# Altium PCB Ender-3.PcbDoc (part 7 of 14)
Units mil, origin at the board's own origin, x right, y up, seen from the top; angles counter-clockwise.
Board outline 3970.48 x 2769.68 mil, 2 copper layers (TopLayer, BottomLayer); 146 components, 136 nets, 669 pads, 614 vias.
Unrouted connection lines stored in the file: 1.
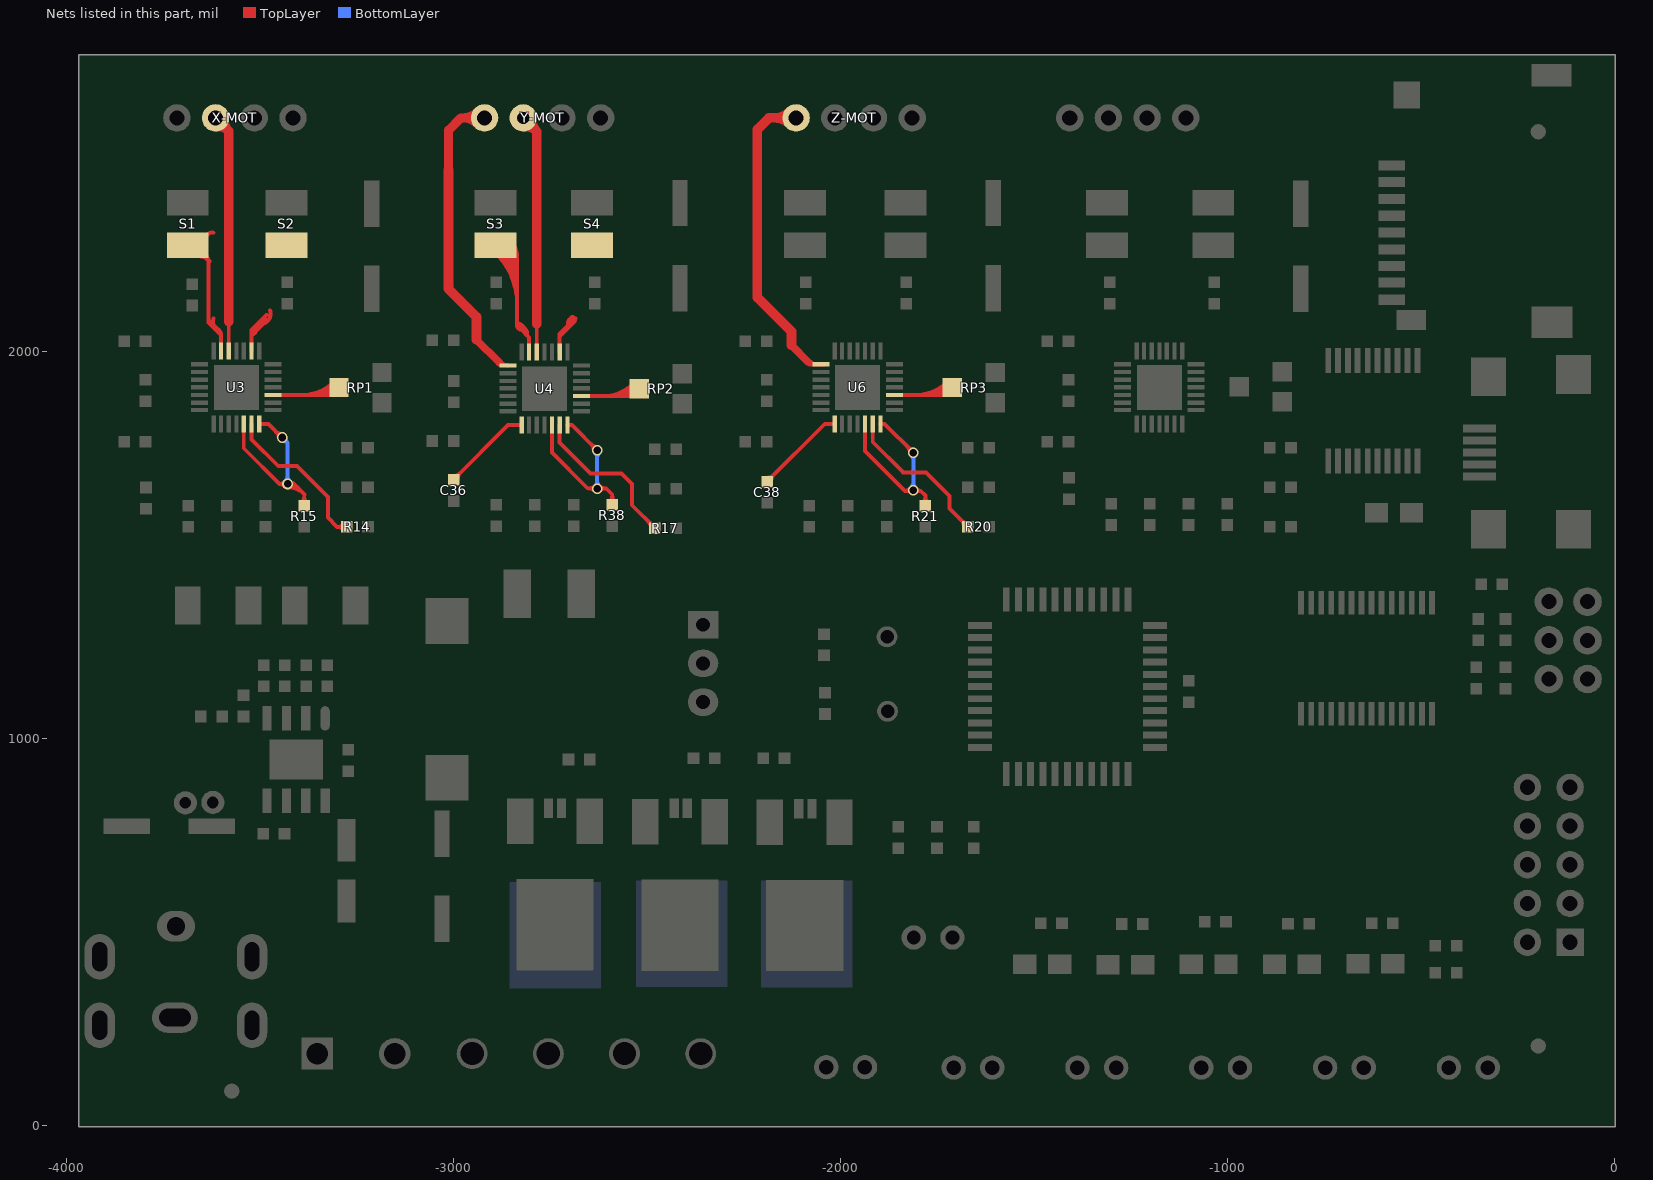
[diagram p7: the nets of this part, all layers, seen from the top]

## Via types
v1: diameter 28, hole 18, TopLayer to BottomLayer, tented both sides, 246 vias
v2: diameter 27.56, hole 19.68, TopLayer to BottomLayer, tented both sides, 196 vias
v3: diameter 20, hole 12, TopLayer to BottomLayer, tented both sides, 124 vias
v4: diameter 27.56, hole 11.81, TopLayer to BottomLayer, tented bottom, 16 vias
v5: diameter 27.56, hole 19.68, TopLayer to BottomLayer, 16 vias
v6: diameter 20, hole 12, TopLayer to BottomLayer, 12 vias
v7: diameter 28, hole 11.81, TopLayer to BottomLayer, tented both sides, 4 vias

## Nets (pads, with @x,y where several pads share a name; then routed paths per layer and width w, separated by ;. In a path a pad name is that pad's centre, name@x,y a point inside that pad or via, vN(x,y) a via of type N, cw(c..) or ccw(c..) an arc to the next point about the centre after c; other vN are vias at no path point) (continued)
NetU3_12: R15.1 U3.12 U3.14 | length 2802.5
  TopLayer w10: -3541.62,1750.93 U3.12@-3541.62,1813.88 ; -3540.62,1749.93 -3449.59,1658.9 ; U3.14@-3501.62,1813.88 -3501.12,1813.38 -3478.07,1813.38 v2@-3442.54,1777.84 ; v2@-3429.27,1659.87 cw(c-3421.02,1648.85) -3411.28,1658.59 ; v2@-3428.54,1650.12 cw(c-3428.54,1588.01) -3384.62,1631.93 ; v2@-3428.54,1660.12 cw(c-3428.54,1622.15) -3401.69,1649 ; v2@-3423.28,1651.87 cw(c-3414.03,1639.51) -3403.12,1650.42 ; R15.1@-3385.62,1602.88 -3385.62,1632.93 -3411.59,1658.9 ; -3459.23,1794.54 ccw(c-3442.54,1811.23) v2@-3442.54,1787.62 ; -3459.23,1794.54 ccw(c-3442.54,1811.23) v2@-3442.54,1787.62 ; -3459.23,1794.54 ccw(c-3442.54,1811.23) v2@-3442.54,1787.62 ; -3459.23,1794.54 ccw(c-3442.54,1811.23) v2@-3442.54,1787.62 ; -3459.23,1794.54 ccw(c-3442.54,1811.23) v2@-3442.54,1787.62 ; -3459.23,1794.54 ccw(c-3442.54,1811.23) v2@-3442.54,1787.62 ; -3459.23,1794.54 ccw(c-3442.54,1811.23) v2@-3442.54,1787.62 ; -3459.23,1794.54 ccw(c-3442.54,1811.23) v2@-3442.54,1787.62 ; -3459.23,1794.54 ccw(c-3442.54,1811.23) v2@-3442.54,1787.62 ; -3456.82,1792.12 cw(c-3470.1,1778.84) v2@-3451.31,1778.84 ; -3456.82,1792.12 cw(c-3470.1,1778.84) v2@-3451.31,1778.84 ; -3456.82,1792.12 cw(c-3470.1,1778.84) v2@-3451.31,1778.84 ; -3456.82,1792.12 cw(c-3470.1,1778.84) v2@-3451.31,1778.84 ; -3456.82,1792.12 cw(c-3470.1,1778.84) v2@-3451.31,1778.84 ; -3456.82,1792.12 cw(c-3470.1,1778.84) v2@-3451.31,1778.84 ; -3456.82,1792.12 cw(c-3470.1,1778.84) v2@-3451.31,1778.84 ; -3456.82,1792.12 cw(c-3470.1,1778.84) v2@-3451.31,1778.84 ; -3456.82,1792.12 cw(c-3470.1,1778.84) v2@-3451.31,1778.84 ; -3449.59,1658.9 cw(c-3449.59,1638.04) v2@-3434.77,1652.72 ; -3449.59,1658.9 ccw(c-3449.59,1679.75) v2@-3434.77,1665.07 ; -3449.59,1658.9 cw(c-3449.59,1638.04) v2@-3434.77,1652.72 ; -3449.59,1658.9 ccw(c-3449.59,1679.75) v2@-3434.77,1665.07 ; -3449.59,1658.9 cw(c-3449.59,1638.04) v2@-3434.77,1652.72 ; -3449.59,1658.9 ccw(c-3449.59,1679.75) v2@-3434.77,1665.07 ; -3449.59,1658.9 cw(c-3449.59,1638.04) v2@-3434.77,1652.72 ; -3449.59,1658.9 ccw(c-3449.59,1679.75) v2@-3434.77,1665.07 ; -3449.59,1658.9 cw(c-3449.59,1638.04) v2@-3434.77,1652.72 ; -3449.59,1658.9 ccw(c-3449.59,1679.75) v2@-3434.77,1665.07 ; -3449.59,1658.9 ccw(c-3449.59,1679.75) v2@-3434.77,1665.07 ; -3449.59,1658.9 cw(c-3449.59,1638.04) v2@-3434.77,1652.72 ; -3449.59,1658.9 ccw(c-3449.59,1679.75) v2@-3434.77,1665.07 ; -3449.59,1658.9 cw(c-3449.59,1638.04) v2@-3434.77,1652.72 ; -3449.59,1658.9 ccw(c-3449.59,1679.75) v2@-3434.77,1665.07 ; -3449.59,1658.9 cw(c-3449.59,1638.04) v2@-3434.77,1652.72 ; -3449.59,1658.9 ccw(c-3449.59,1679.75) v2@-3434.77,1665.07 ; -3449.59,1658.9 cw(c-3449.59,1638.04) v2@-3434.77,1652.72 ; -3449.59,1658.9 -3411.59,1658.9 ; v2@-3428.83,1660.08 cw(c-3423.17,1637.34) -3406.6,1653.91 ; v2@-3428.83,1660.08 cw(c-3423.17,1637.34) -3406.6,1653.91 ; v2@-3428.83,1660.08 cw(c-3423.17,1637.34) -3406.6,1653.91 ; v2@-3428.83,1660.08 cw(c-3423.17,1637.34) -3406.6,1653.91 ; v2@-3428.83,1660.08 cw(c-3423.17,1637.34) -3406.6,1653.91 ; v2@-3428.83,1660.08 cw(c-3423.17,1637.34) -3406.6,1653.91 ; v2@-3428.83,1660.08 cw(c-3423.17,1637.34) -3406.6,1653.91 ; v2@-3428.83,1660.08 cw(c-3423.17,1637.34) -3406.6,1653.91 ; v2@-3426.42,1650.38 cw(c-3418.19,1617.31) -3394.1,1641.4 ; v2@-3426.42,1650.38 cw(c-3418.19,1617.31) -3394.1,1641.4 ; v2@-3426.42,1650.38 cw(c-3418.19,1617.31) -3394.1,1641.4 ; v2@-3426.42,1650.38 cw(c-3418.19,1617.31) -3394.1,1641.4 ; v2@-3426.42,1650.38 cw(c-3418.19,1617.31) -3394.1,1641.4 ; v2@-3426.42,1650.38 cw(c-3418.19,1617.31) -3394.1,1641.4 ; v2@-3426.42,1650.38 cw(c-3418.19,1617.31) -3394.1,1641.4 ; v2@-3426.42,1650.38 cw(c-3418.19,1617.31) -3394.1,1641.4 ; v2@-3421.36,1653.83 cw(c-3411.59,1646.93) -3411.59,1658.9 ; v2@-3421.36,1653.83 cw(c-3411.59,1646.93) -3411.59,1658.9 ; v2@-3421.36,1653.83 cw(c-3411.59,1646.93) -3411.59,1658.9 ; v2@-3421.36,1653.83 cw(c-3411.59,1646.93) -3411.59,1658.9 ; v2@-3421.36,1653.83 cw(c-3411.59,1646.93) -3411.59,1658.9 ; v2@-3421.36,1653.83 cw(c-3411.59,1646.93) -3411.59,1658.9 ; v2@-3421.36,1653.83 cw(c-3411.59,1646.93) -3411.59,1658.9 ; v2@-3421.36,1653.83 cw(c-3411.59,1646.93) -3411.59,1658.9 ; v2@-3421.36,1653.83 cw(c-3411.59,1646.93) -3411.59,1658.9 ; v2@-3421.36,1663.96 ccw(c-3411.59,1670.86) -3411.59,1658.9 ; v2@-3421.36,1663.96 ccw(c-3411.59,1670.86) -3411.59,1658.9 ; v2@-3421.36,1663.96 ccw(c-3411.59,1670.86) -3411.59,1658.9 ; v2@-3421.36,1663.96 ccw(c-3411.59,1670.86) -3411.59,1658.9 ; v2@-3421.36,1663.96 ccw(c-3411.59,1670.86) -3411.59,1658.9 ; v2@-3421.36,1663.96 ccw(c-3411.59,1670.86) -3411.59,1658.9 ; v2@-3421.36,1663.96 ccw(c-3411.59,1670.86) -3411.59,1658.9 ; v2@-3421.36,1663.96 ccw(c-3411.59,1670.86) -3411.59,1658.9 ; v2@-3421.36,1663.96 ccw(c-3411.59,1670.86) -3411.59,1658.9 ; R15.1@-3392.69,1609.95 ccw(c-3409.76,1627.02) -3385.62,1627.02 ; R15.1@-3392.69,1609.95 ccw(c-3409.76,1627.02) -3385.62,1627.02 ; R15.1@-3392.69,1609.95 ccw(c-3409.76,1627.02) -3385.62,1627.02 ; R15.1@-3392.69,1609.95 ccw(c-3409.76,1627.02) -3385.62,1627.02 ; R15.1@-3392.69,1609.95 ccw(c-3409.76,1627.02) -3385.62,1627.02 ; R15.1@-3392.69,1609.95 ccw(c-3409.76,1627.02) -3385.62,1627.02 ; R15.1@-3392.69,1609.95 ccw(c-3409.76,1627.02) -3385.62,1627.02 ; R15.1@-3392.69,1609.95 ccw(c-3409.76,1627.02) -3385.62,1627.02 ; R15.1@-3392.69,1609.95 ccw(c-3409.76,1627.02) -3385.62,1627.02 ; -3385.62,1627.02 ccw(c-3361.48,1627.02) R15.1@-3378.55,1609.95 ; -3385.62,1627.02 ccw(c-3361.48,1627.02) R15.1@-3378.55,1609.95 ; -3385.62,1627.02 ccw(c-3361.48,1627.02) R15.1@-3378.55,1609.95 ; -3385.62,1627.02 ccw(c-3361.48,1627.02) R15.1@-3378.55,1609.95 ; -3385.62,1627.02 ccw(c-3361.48,1627.02) R15.1@-3378.55,1609.95 ; -3385.62,1627.02 ccw(c-3361.48,1627.02) R15.1@-3378.55,1609.95 ; -3385.62,1627.02 ccw(c-3361.48,1627.02) R15.1@-3378.55,1609.95 ; -3385.62,1627.02 ccw(c-3361.48,1627.02) R15.1@-3378.55,1609.95 ; -3385.62,1627.02 ccw(c-3361.48,1627.02) R15.1@-3378.55,1609.95
  BottomLayer w10: v2(-3442.54,1778.84) -3428.54,1764.84 ; v2(-3428.54,1658.9) -3428.54,1764.84 ; v2@-3442.1,1770.07 cw(c-3441.22,1752.16) -3428.54,1764.84 ; v2@-3442.1,1770.07 cw(c-3441.22,1752.16) -3428.54,1764.84 ; v2@-3442.1,1770.07 cw(c-3441.22,1752.16) -3428.54,1764.84 ; v2@-3442.1,1770.07 cw(c-3441.22,1752.16) -3428.54,1764.84 ; v2@-3442.1,1770.07 cw(c-3441.22,1752.16) -3428.54,1764.84 ; v2@-3442.1,1770.07 cw(c-3441.22,1752.16) -3428.54,1764.84 ; v2@-3442.1,1770.07 cw(c-3441.22,1752.16) -3428.54,1764.84 ; v2@-3442.1,1770.07 cw(c-3441.22,1752.16) -3428.54,1764.84 ; v2@-3442.1,1770.07 cw(c-3441.22,1752.16) -3428.54,1764.84 ; v2@-3434.74,1665.1 ccw(c-3449.73,1680.09) -3428.54,1680.09 ; v2@-3434.74,1665.1 ccw(c-3449.73,1680.09) -3428.54,1680.09 ; v2@-3434.74,1665.1 ccw(c-3449.73,1680.09) -3428.54,1680.09 ; v2@-3434.74,1665.1 ccw(c-3449.73,1680.09) -3428.54,1680.09 ; v2@-3434.74,1665.1 ccw(c-3449.73,1680.09) -3428.54,1680.09 ; v2@-3434.74,1665.1 ccw(c-3449.73,1680.09) -3428.54,1680.09 ; v2@-3434.74,1665.1 ccw(c-3449.73,1680.09) -3428.54,1680.09 ; v2@-3434.74,1665.1 ccw(c-3449.73,1680.09) -3428.54,1680.09 ; v2@-3434.74,1665.1 ccw(c-3449.73,1680.09) -3428.54,1680.09 ; v2@-3433.77,1778.41 ccw(c-3415.86,1777.52) -3428.54,1764.84 ; v2@-3433.77,1778.41 ccw(c-3415.86,1777.52) -3428.54,1764.84 ; v2@-3433.77,1778.41 ccw(c-3415.86,1777.52) -3428.54,1764.84 ; v2@-3433.77,1778.41 ccw(c-3415.86,1777.52) -3428.54,1764.84 ; v2@-3433.77,1778.41 ccw(c-3415.86,1777.52) -3428.54,1764.84 ; v2@-3433.77,1778.41 ccw(c-3415.86,1777.52) -3428.54,1764.84 ; v2@-3433.77,1778.41 ccw(c-3415.86,1777.52) -3428.54,1764.84 ; v2@-3433.77,1778.41 ccw(c-3415.86,1777.52) -3428.54,1764.84 ; v2@-3433.77,1778.41 ccw(c-3415.86,1777.52) -3428.54,1764.84 ; -3428.54,1680.09 ccw(c-3407.34,1680.09) v2@-3422.33,1665.1 ; -3428.54,1680.09 ccw(c-3407.34,1680.09) v2@-3422.33,1665.1 ; -3428.54,1680.09 ccw(c-3407.34,1680.09) v2@-3422.33,1665.1 ; -3428.54,1680.09 ccw(c-3407.34,1680.09) v2@-3422.33,1665.1 ; -3428.54,1680.09 ccw(c-3407.34,1680.09) v2@-3422.33,1665.1 ; -3428.54,1680.09 ccw(c-3407.34,1680.09) v2@-3422.33,1665.1 ; -3428.54,1680.09 ccw(c-3407.34,1680.09) v2@-3422.33,1665.1 ; -3428.54,1680.09 ccw(c-3407.34,1680.09) v2@-3422.33,1665.1 ; -3428.54,1680.09 ccw(c-3407.34,1680.09) v2@-3422.33,1665.1
NetU3_13: R14.1 U3.13 | length 751.9
  TopLayer w10: U3.13@-3521.62,1813.88 -3521.62,1773.93 -3452.54,1704.84 -3404.54,1704.84 -3324.54,1624.84 -3324.54,1571.84 -3300.57,1547.88 R14.1@-3275.62,1547.88 ; -3299.76,1547.88 cw(c-3299.76,1523.74) R14.1@-3282.69,1540.81 ; -3299.76,1547.88 ccw(c-3299.76,1572.02) R14.1@-3282.69,1554.95 ; -3299.76,1547.88 cw(c-3299.76,1523.74) R14.1@-3282.69,1540.81 ; -3299.76,1547.88 ccw(c-3299.76,1572.02) R14.1@-3282.69,1554.95 ; -3299.76,1547.88 cw(c-3299.76,1523.74) R14.1@-3282.69,1540.81 ; -3299.76,1547.88 ccw(c-3299.76,1572.02) R14.1@-3282.69,1554.95 ; -3299.76,1547.88 cw(c-3299.76,1523.74) R14.1@-3282.69,1540.81 ; -3299.76,1547.88 ccw(c-3299.76,1572.02) R14.1@-3282.69,1554.95 ; -3299.76,1547.88 cw(c-3299.76,1523.74) R14.1@-3282.69,1540.81 ; -3299.76,1547.88 ccw(c-3299.76,1572.02) R14.1@-3282.69,1554.95 ; -3299.76,1547.88 ccw(c-3299.76,1572.02) R14.1@-3282.69,1554.95 ; -3299.76,1547.88 cw(c-3299.76,1523.74) R14.1@-3282.69,1540.81 ; -3299.76,1547.88 ccw(c-3299.76,1572.02) R14.1@-3282.69,1554.95 ; -3299.76,1547.88 cw(c-3299.76,1523.74) R14.1@-3282.69,1540.81 ; -3299.76,1547.88 ccw(c-3299.76,1572.02) R14.1@-3282.69,1554.95 ; -3299.76,1547.88 cw(c-3299.76,1523.74) R14.1@-3282.69,1540.81 ; -3299.76,1547.88 ccw(c-3299.76,1572.02) R14.1@-3282.69,1554.95 ; -3299.76,1547.88 cw(c-3299.76,1523.74) R14.1@-3282.69,1540.81
NetU3_17: RP1.1 U3.17 | length 1628.2
  TopLayer w10: U3.17@-3465.62,1888.88 -3314.62,1888.88 RP1.1@-3295.62,1907.88 ; -3389.78,1888.88 ccw(c-3389.78,2002.04) RP1.1@-3309.76,1922.02 ; -3389.78,1888.88 ccw(c-3389.78,2002.04) RP1.1@-3309.76,1922.02 ; -3389.78,1888.88 ccw(c-3389.78,2002.04) RP1.1@-3309.76,1922.02 ; -3389.78,1888.88 ccw(c-3389.78,2002.04) RP1.1@-3309.76,1922.02 ; -3389.78,1888.88 ccw(c-3389.78,2002.04) RP1.1@-3309.76,1922.02 ; -3389.78,1888.88 ccw(c-3389.78,2002.04) RP1.1@-3309.76,1922.02 ; -3365.64,1888.88 ccw(c-3365.64,1977.89) RP1.1@-3302.69,1914.95 ; -3365.64,1888.88 ccw(c-3365.64,1977.89) RP1.1@-3302.69,1914.95 ; -3365.64,1888.88 ccw(c-3365.64,1977.89) RP1.1@-3302.69,1914.95 ; -3365.64,1888.88 ccw(c-3365.64,1977.89) RP1.1@-3302.69,1914.95 ; -3365.64,1888.88 ccw(c-3365.64,1977.89) RP1.1@-3302.69,1914.95 ; -3365.64,1888.88 ccw(c-3365.64,1977.89) RP1.1@-3302.69,1914.95 ; -3341.49,1888.88 ccw(c-3341.49,1953.75) RP1.1@-3295.62,1907.88 ; -3341.49,1888.88 ccw(c-3341.49,1953.75) RP1.1@-3295.62,1907.88 ; -3341.49,1888.88 ccw(c-3341.49,1953.75) RP1.1@-3295.62,1907.88 ; -3341.49,1888.88 ccw(c-3341.49,1953.75) RP1.1@-3295.62,1907.88 ; -3341.49,1888.88 ccw(c-3341.49,1953.75) RP1.1@-3295.62,1907.88 ; -3341.49,1888.88 ccw(c-3341.49,1953.75) RP1.1@-3295.62,1907.88 ; RP1.1@-3317.35,1888.88 ccw(c-3317.35,1929.61) RP1.1@-3288.55,1900.81 ; RP1.1@-3317.35,1888.88 ccw(c-3317.35,1929.61) RP1.1@-3288.55,1900.81 ; RP1.1@-3317.35,1888.88 ccw(c-3317.35,1929.61) RP1.1@-3288.55,1900.81 ; RP1.1@-3317.35,1888.88 ccw(c-3317.35,1929.61) RP1.1@-3288.55,1900.81 ; RP1.1@-3317.35,1888.88 ccw(c-3317.35,1929.61) RP1.1@-3288.55,1900.81 ; RP1.1@-3317.35,1888.88 ccw(c-3317.35,1929.61) RP1.1@-3288.55,1900.81
NetU3_23: S2.1 U3.23 | length 209.3
  TopLayer w10: U3.23@-3521.62,2002.88 -3521.62,2056.76 -3482.54,2095.84 ; -3521.62,2045.84 ccw(c-3520.08,2054.39) -3511.54,2052.84 -3481.54,2082.84 ; -3491.75,2072.63 ccw(c-3500.25,2099.34) -3473.54,2107.84
NetU3_26: U3.26 X-MOT.2 | length 1021
  TopLayer w10: U3.26@-3580.62,2002.88 -3580.62,2077.84
  TopLayer w23.62: X-MOT.2@-3614.54,2604.84 -3580.62,2570.93 ; -3580.62,2077.84 -3580.62,2570.93 ; X-MOT.2@-3611.47,2581.42 cw(c-3606.7,2544.86) -3580.62,2570.93 ; X-MOT.2@-3611.47,2581.42 cw(c-3606.7,2544.86) -3580.62,2570.93 ; X-MOT.2@-3611.47,2581.42 cw(c-3606.7,2544.86) -3580.62,2570.93 ; X-MOT.2@-3611.47,2581.42 cw(c-3606.7,2544.86) -3580.62,2570.93 ; X-MOT.2@-3611.47,2581.42 cw(c-3606.7,2544.86) -3580.62,2570.93 ; X-MOT.2@-3611.47,2581.42 cw(c-3606.7,2544.86) -3580.62,2570.93 ; X-MOT.2@-3591.11,2601.78 ccw(c-3554.55,2597) -3580.62,2570.93 ; X-MOT.2@-3591.11,2601.78 ccw(c-3554.55,2597) -3580.62,2570.93 ; X-MOT.2@-3591.11,2601.78 ccw(c-3554.55,2597) -3580.62,2570.93 ; X-MOT.2@-3591.11,2601.78 ccw(c-3554.55,2597) -3580.62,2570.93 ; X-MOT.2@-3591.11,2601.78 ccw(c-3554.55,2597) -3580.62,2570.93 ; X-MOT.2@-3591.11,2601.78 ccw(c-3554.55,2597) -3580.62,2570.93
NetU3_27: S1.1 U3.27 | length 1305.1
  TopLayer w10: S1.1@-3671.54,2275.84 -3632.54,2236.84 -3632.54,2075.84 -3600.62,2043.93 ; S1.1@-3661.17,2248.18 cw(c-3656.55,2218.83) -3635.54,2239.84 cw(c-3620.05,2255.33) S1.1@-3640.01,2264.33 ; S1.1@-3639.54,2295.84 cw(c-3623.54,2291.84) -3619.54,2307.84 ; -3632.54,2082.84 -3609.62,2059.93 cw(c-3601.12,2078.34) -3619.54,2086.84 ; -3620.54,2062.84 cw(c-3620.04,2043.43) -3600.62,2043.93 ; U3.27@-3600.62,2002.88 -3600.62,2043.93 ; S1.1@-3664.75,2247.85 cw(c-3663.4,2199.98) -3629.54,2233.84 ; S1.1@-3664.75,2247.85 cw(c-3663.4,2199.98) -3629.54,2233.84 ; S1.1@-3664.75,2247.85 cw(c-3663.4,2199.98) -3629.54,2233.84 ; S1.1@-3664.75,2247.85 cw(c-3663.4,2199.98) -3629.54,2233.84 ; S1.1@-3664.75,2247.85 cw(c-3663.4,2199.98) -3629.54,2233.84 ; S1.1@-3664.75,2247.85 cw(c-3663.4,2199.98) -3629.54,2233.84 ; S1.1@-3664.75,2247.85 cw(c-3663.4,2199.98) -3629.54,2233.84 ; S1.1@-3664.75,2247.85 cw(c-3663.4,2199.98) -3629.54,2233.84 ; S1.1@-3648.2,2271 ccw(c-3623.49,2264.08) S1.1@-3641.63,2245.94 ; S1.1@-3648.2,2271 ccw(c-3623.49,2264.08) S1.1@-3641.63,2245.94 ; S1.1@-3648.2,2271 ccw(c-3623.49,2264.08) S1.1@-3641.63,2245.94 ; S1.1@-3648.2,2271 ccw(c-3623.49,2264.08) S1.1@-3641.63,2245.94 ; S1.1@-3648.2,2271 ccw(c-3623.49,2264.08) S1.1@-3641.63,2245.94 ; S1.1@-3648.2,2271 ccw(c-3623.49,2264.08) S1.1@-3641.63,2245.94 ; S1.1@-3648.2,2271 ccw(c-3623.49,2264.08) S1.1@-3641.63,2245.94 ; S1.1@-3648.2,2271 ccw(c-3623.49,2264.08) S1.1@-3641.63,2245.94 ; S1.1@-3638.57,2268.3 ccw(c-3604.58,2258.8) -3629.54,2233.84 ; S1.1@-3638.57,2268.3 ccw(c-3604.58,2258.8) -3629.54,2233.84 ; S1.1@-3638.57,2268.3 ccw(c-3604.58,2258.8) -3629.54,2233.84 ; S1.1@-3638.57,2268.3 ccw(c-3604.58,2258.8) -3629.54,2233.84 ; S1.1@-3638.57,2268.3 ccw(c-3604.58,2258.8) -3629.54,2233.84 ; S1.1@-3638.57,2268.3 ccw(c-3604.58,2258.8) -3629.54,2233.84 ; S1.1@-3638.57,2268.3 ccw(c-3604.58,2258.8) -3629.54,2233.84 ; S1.1@-3638.57,2268.3 ccw(c-3604.58,2258.8) -3629.54,2233.84
NetU4_1: U4.1 Y-MOT.1 | length 1403.6
  TopLayer w10: U4.1@-2870.54,1965.84 ccw(c-2879.54,1963.84) -2881.54,1972.84 ccw(c-2876.54,1970.84) -2878.54,1965.84 -2860.54,1965.84 U4.1@-2860.04,1965.34
  TopLayer w20: -2940.54,2031.84 -2881.54,1972.84
  TopLayer w23.62: -3012.54,2406.84 -3012.54,2572.84 -2980.54,2604.84 Y-MOT.1@-2919.54,2604.84 ; -2976.56,2604.84 cw(c-2976.56,2547.81) Y-MOT.1@-2936.24,2588.14 ; -2976.56,2604.84 ccw(c-2976.56,2661.87) Y-MOT.1@-2936.24,2621.55 ; -2976.56,2604.84 cw(c-2976.56,2547.81) Y-MOT.1@-2936.24,2588.14 ; -2976.56,2604.84 ccw(c-2976.56,2661.87) Y-MOT.1@-2936.24,2621.55 ; -2976.56,2604.84 cw(c-2976.56,2547.81) Y-MOT.1@-2936.24,2588.14 ; -2976.56,2604.84 ccw(c-2976.56,2661.87) Y-MOT.1@-2936.24,2621.55 ; -2976.56,2604.84 ccw(c-2976.56,2661.87) Y-MOT.1@-2936.24,2621.55 ; -2976.56,2604.84 cw(c-2976.56,2547.81) Y-MOT.1@-2936.24,2588.14 ; -2976.56,2604.84 ccw(c-2976.56,2661.87) Y-MOT.1@-2936.24,2621.55 ; -2976.56,2604.84 cw(c-2976.56,2547.81) Y-MOT.1@-2936.24,2588.14 ; -2976.56,2604.84 ccw(c-2976.56,2661.87) Y-MOT.1@-2936.24,2621.55 ; -2976.56,2604.84 cw(c-2976.56,2547.81) Y-MOT.1@-2936.24,2588.14
  TopLayer w25: -3012.54,2470.84 -3012.54,2162.84 -2940.54,2090.84 -2940.54,2031.84
NetU4_8: C36.1 U4.8 | length 575.7
  TopLayer w10: C36.1@-2999.54,1669.84 -2858.54,1810.84 U4.8@-2823.54,1810.84 ; C36.1@-2999.54,1679.84 ccw(c-2999.54,1703.98) -2982.46,1686.91 ; C36.1@-2999.54,1679.84 ccw(c-2999.54,1703.98) -2982.46,1686.91 ; C36.1@-2999.54,1679.84 ccw(c-2999.54,1703.98) -2982.46,1686.91 ; C36.1@-2999.54,1679.84 ccw(c-2999.54,1703.98) -2982.46,1686.91 ; C36.1@-2999.54,1679.84 ccw(c-2999.54,1703.98) -2982.46,1686.91 ; C36.1@-2999.54,1679.84 ccw(c-2999.54,1703.98) -2982.46,1686.91 ; C36.1@-2999.54,1679.84 ccw(c-2999.54,1703.98) -2982.46,1686.91 ; C36.1@-2999.54,1679.84 ccw(c-2999.54,1703.98) -2982.46,1686.91 ; C36.1@-2999.54,1679.84 ccw(c-2999.54,1703.98) -2982.46,1686.91 ; C36.1@-2989.54,1669.84 cw(c-2965.39,1669.84) -2982.46,1686.91 ; C36.1@-2989.54,1669.84 cw(c-2965.39,1669.84) -2982.46,1686.91 ; C36.1@-2989.54,1669.84 cw(c-2965.39,1669.84) -2982.46,1686.91 ; C36.1@-2989.54,1669.84 cw(c-2965.39,1669.84) -2982.46,1686.91 ; C36.1@-2989.54,1669.84 cw(c-2965.39,1669.84) -2982.46,1686.91 ; C36.1@-2989.54,1669.84 cw(c-2965.39,1669.84) -2982.46,1686.91 ; C36.1@-2989.54,1669.84 cw(c-2965.39,1669.84) -2982.46,1686.91 ; C36.1@-2989.54,1669.84 cw(c-2965.39,1669.84) -2982.46,1686.91 ; C36.1@-2989.54,1669.84 cw(c-2965.39,1669.84) -2982.46,1686.91
NetU4_12: R38.1 U4.12 U4.14 | length 2335.2
  TopLayer w10: U4.12@-2745.54,1810.84 -2745.54,1739.84 -2653.54,1647.84 -2605.54,1647.84 ; U4.14@-2705.54,1810.84 U4.14@-2705.04,1810.34 ; U4.14@-2705.04,1810.84 -2693.54,1810.84 v2(-2628.54,1745.84) ; R38.1@-2589.54,1604.84 -2589.54,1631.84 -2605.54,1647.84 ; -2652.15,1647.84 cw(c-2652.15,1623.23) v2@-2634.74,1640.63 ; -2652.15,1647.84 cw(c-2652.15,1623.23) v2@-2634.74,1640.63 ; -2652.15,1647.84 cw(c-2652.15,1623.23) v2@-2634.74,1640.63 ; -2652.15,1647.84 cw(c-2652.15,1623.23) v2@-2634.74,1640.63 ; -2652.15,1647.84 cw(c-2652.15,1623.23) v2@-2634.74,1640.63 ; -2652.15,1647.84 cw(c-2652.15,1623.23) v2@-2634.74,1640.63 ; -2652.15,1647.84 cw(c-2652.15,1623.23) v2@-2634.74,1640.63 ; -2652.15,1647.84 cw(c-2652.15,1623.23) v2@-2634.74,1640.63 ; -2652.15,1647.84 cw(c-2652.15,1623.23) v2@-2634.74,1640.63 ; -2647.32,1647.84 ccw(c-2647.32,1665.62) v2@-2634.74,1653.05 ; -2647.32,1647.84 ccw(c-2647.32,1665.62) v2@-2634.74,1653.05 ; -2647.32,1647.84 ccw(c-2647.32,1665.62) v2@-2634.74,1653.05 ; -2647.32,1647.84 ccw(c-2647.32,1665.62) v2@-2634.74,1653.05 ; -2647.32,1647.84 ccw(c-2647.32,1665.62) v2@-2634.74,1653.05 ; -2647.32,1647.84 ccw(c-2647.32,1665.62) v2@-2634.74,1653.05 ; -2647.32,1647.84 ccw(c-2647.32,1665.62) v2@-2634.74,1653.05 ; -2647.32,1647.84 ccw(c-2647.32,1665.62) v2@-2634.74,1653.05 ; -2647.32,1647.84 ccw(c-2647.32,1665.62) v2@-2634.74,1653.05 ; -2643.52,1760.83 cw(c-2658.51,1745.84) v2@-2637.31,1745.84 ; -2643.52,1760.83 ccw(c-2628.54,1775.82) v2@-2628.54,1754.62 ; -2643.52,1760.83 cw(c-2658.51,1745.84) v2@-2637.31,1745.84 ; -2643.52,1760.83 ccw(c-2628.54,1775.82) v2@-2628.54,1754.62 ; -2643.52,1760.83 cw(c-2658.51,1745.84) v2@-2637.31,1745.84 ; -2643.52,1760.83 ccw(c-2628.54,1775.82) v2@-2628.54,1754.62 ; -2643.52,1760.83 cw(c-2658.51,1745.84) v2@-2637.31,1745.84 ; -2643.52,1760.83 ccw(c-2628.54,1775.82) v2@-2628.54,1754.62 ; -2643.52,1760.83 cw(c-2658.51,1745.84) v2@-2637.31,1745.84 ; -2643.52,1760.83 ccw(c-2628.54,1775.82) v2@-2628.54,1754.62 ; -2643.52,1760.83 ccw(c-2628.54,1775.82) v2@-2628.54,1754.62 ; -2643.52,1760.83 cw(c-2658.51,1745.84) v2@-2637.31,1745.84 ; -2643.52,1760.83 ccw(c-2628.54,1775.82) v2@-2628.54,1754.62 ; -2643.52,1760.83 cw(c-2658.51,1745.84) v2@-2637.31,1745.84 ; -2643.52,1760.83 ccw(c-2628.54,1775.82) v2@-2628.54,1754.62 ; -2643.52,1760.83 cw(c-2658.51,1745.84) v2@-2637.31,1745.84 ; -2643.52,1760.83 ccw(c-2628.54,1775.82) v2@-2628.54,1754.62 ; -2643.52,1760.83 cw(c-2658.51,1745.84) v2@-2637.31,1745.84 ; v2@-2622.33,1653.05 ccw(c-2609.75,1665.62) -2609.75,1647.84 ; v2@-2622.33,1653.05 ccw(c-2609.75,1665.62) -2609.75,1647.84 ; v2@-2622.33,1653.05 ccw(c-2609.75,1665.62) -2609.75,1647.84 ; v2@-2622.33,1653.05 ccw(c-2609.75,1665.62) -2609.75,1647.84 ; v2@-2622.33,1653.05 ccw(c-2609.75,1665.62) -2609.75,1647.84 ; v2@-2622.33,1653.05 ccw(c-2609.75,1665.62) -2609.75,1647.84 ; v2@-2622.33,1653.05 ccw(c-2609.75,1665.62) -2609.75,1647.84 ; v2@-2622.33,1653.05 ccw(c-2609.75,1665.62) -2609.75,1647.84 ; v2@-2622.33,1653.05 ccw(c-2609.75,1665.62) -2609.75,1647.84 ; v2@-2622.22,1640.75 cw(c-2605.51,1624.64) -2605.51,1647.84 ; v2@-2622.22,1640.75 cw(c-2605.51,1624.64) -2605.51,1647.84 ; v2@-2622.22,1640.75 cw(c-2605.51,1624.64) -2605.51,1647.84 ; v2@-2622.22,1640.75 cw(c-2605.51,1624.64) -2605.51,1647.84 ; v2@-2622.22,1640.75 cw(c-2605.51,1624.64) -2605.51,1647.84 ; v2@-2622.22,1640.75 cw(c-2605.51,1624.64) -2605.51,1647.84 ; v2@-2622.22,1640.75 cw(c-2605.51,1624.64) -2605.51,1647.84 ; v2@-2622.22,1640.75 cw(c-2605.51,1624.64) -2605.51,1647.84 ; v2@-2622.21,1640.75 cw(c-2605.54,1624.69) -2605.54,1647.84 ; R38.1@-2596.61,1611.91 ccw(c-2613.68,1628.98) -2589.54,1628.98 ; R38.1@-2596.61,1611.91 ccw(c-2613.68,1628.98) -2589.54,1628.98 ; R38.1@-2596.61,1611.91 ccw(c-2613.68,1628.98) -2589.54,1628.98 ; R38.1@-2596.61,1611.91 ccw(c-2613.68,1628.98) -2589.54,1628.98 ; R38.1@-2596.61,1611.91 ccw(c-2613.68,1628.98) -2589.54,1628.98 ; R38.1@-2596.61,1611.91 ccw(c-2613.68,1628.98) -2589.54,1628.98 ; R38.1@-2596.61,1611.91 ccw(c-2613.68,1628.98) -2589.54,1628.98 ; R38.1@-2596.61,1611.91 ccw(c-2613.68,1628.98) -2589.54,1628.98 ; R38.1@-2596.61,1611.91 ccw(c-2613.68,1628.98) -2589.54,1628.98 ; -2589.54,1628.98 ccw(c-2565.39,1628.98) R38.1@-2582.46,1611.91 ; -2589.54,1628.98 ccw(c-2565.39,1628.98) R38.1@-2582.46,1611.91 ; -2589.54,1628.98 ccw(c-2565.39,1628.98) R38.1@-2582.46,1611.91 ; -2589.54,1628.98 ccw(c-2565.39,1628.98) R38.1@-2582.46,1611.91 ; -2589.54,1628.98 ccw(c-2565.39,1628.98) R38.1@-2582.46,1611.91 ; -2589.54,1628.98 ccw(c-2565.39,1628.98) R38.1@-2582.46,1611.91 ; -2589.54,1628.98 ccw(c-2565.39,1628.98) R38.1@-2582.46,1611.91 ; -2589.54,1628.98 ccw(c-2565.39,1628.98) R38.1@-2582.46,1611.91 ; -2589.54,1628.98 ccw(c-2565.39,1628.98) R38.1@-2582.46,1611.91
  BottomLayer w10: v2(-2628.54,1646.84) v2(-2628.54,1745.84) ; v2@-2634.74,1653.05 ccw(c-2649.73,1668.04) -2628.54,1668.04 ; v2@-2634.74,1653.05 ccw(c-2649.73,1668.04) -2628.54,1668.04 ; v2@-2634.74,1653.05 ccw(c-2649.73,1668.04) -2628.54,1668.04 ; v2@-2634.74,1653.05 ccw(c-2649.73,1668.04) -2628.54,1668.04 ; v2@-2634.74,1653.05 ccw(c-2649.73,1668.04) -2628.54,1668.04 ; v2@-2634.74,1653.05 ccw(c-2649.73,1668.04) -2628.54,1668.04 ; v2@-2634.74,1653.05 ccw(c-2649.73,1668.04) -2628.54,1668.04 ; v2@-2634.74,1653.05 ccw(c-2649.73,1668.04) -2628.54,1668.04 ; v2@-2634.74,1653.05 ccw(c-2649.73,1668.04) -2628.54,1668.04 ; v2@-2634.74,1739.63 cw(c-2649.73,1724.65) -2628.54,1724.65 ; v2@-2634.74,1739.63 cw(c-2649.73,1724.65) -2628.54,1724.65 ; v2@-2634.74,1739.63 cw(c-2649.73,1724.65) -2628.54,1724.65 ; v2@-2634.74,1739.63 cw(c-2649.73,1724.65) -2628.54,1724.65 ; v2@-2634.74,1739.63 cw(c-2649.73,1724.65) -2628.54,1724.65 ; v2@-2634.74,1739.63 cw(c-2649.73,1724.65) -2628.54,1724.65 ; v2@-2634.74,1739.63 cw(c-2649.73,1724.65) -2628.54,1724.65 ; v2@-2634.74,1739.63 cw(c-2649.73,1724.65) -2628.54,1724.65 ; v2@-2634.74,1739.63 cw(c-2649.73,1724.65) -2628.54,1724.65 ; -2628.54,1668.04 ccw(c-2607.34,1668.04) v2@-2622.33,1653.05 ; -2628.54,1668.04 ccw(c-2607.34,1668.04) v2@-2622.33,1653.05 ; -2628.54,1668.04 ccw(c-2607.34,1668.04) v2@-2622.33,1653.05 ; -2628.54,1668.04 ccw(c-2607.34,1668.04) v2@-2622.33,1653.05 ; -2628.54,1668.04 ccw(c-2607.34,1668.04) v2@-2622.33,1653.05 ; -2628.54,1668.04 ccw(c-2607.34,1668.04) v2@-2622.33,1653.05 ; -2628.54,1668.04 ccw(c-2607.34,1668.04) v2@-2622.33,1653.05 ; -2628.54,1668.04 ccw(c-2607.34,1668.04) v2@-2622.33,1653.05 ; -2628.54,1668.04 ccw(c-2607.34,1668.04) v2@-2622.33,1653.05 ; -2628.54,1724.65 cw(c-2607.34,1724.65) v2@-2622.33,1739.63 ; -2628.54,1724.65 cw(c-2607.34,1724.65) v2@-2622.33,1739.63 ; -2628.54,1724.65 cw(c-2607.34,1724.65) v2@-2622.33,1739.63 ; -2628.54,1724.65 cw(c-2607.34,1724.65) v2@-2622.33,1739.63 ; -2628.54,1724.65 cw(c-2607.34,1724.65) v2@-2622.33,1739.63 ; -2628.54,1724.65 cw(c-2607.34,1724.65) v2@-2622.33,1739.63 ; -2628.54,1724.65 cw(c-2607.34,1724.65) v2@-2622.33,1739.63 ; -2628.54,1724.65 cw(c-2607.34,1724.65) v2@-2622.33,1739.63 ; -2628.54,1724.65 cw(c-2607.34,1724.65) v2@-2622.33,1739.63
NetU4_13: R17.1 U4.13 | length 756.1
  TopLayer w10: U4.13@-2725.54,1810.84 -2725.54,1765.84 -2645.54,1685.84 -2565.54,1685.84 -2538.54,1658.84 -2538.54,1603.84 R17.1@-2479.54,1544.84 ; -2496.61,1561.91 cw(c-2513.68,1544.84) R17.1@-2489.54,1544.84 ; -2496.61,1561.91 ccw(c-2479.54,1578.98) R17.1@-2479.54,1554.84 ; -2496.61,1561.91 cw(c-2513.68,1544.84) R17.1@-2489.54,1544.84 ; -2496.61,1561.91 ccw(c-2479.54,1578.98) R17.1@-2479.54,1554.84 ; -2496.61,1561.91 cw(c-2513.68,1544.84) R17.1@-2489.54,1544.84 ; -2496.61,1561.91 ccw(c-2479.54,1578.98) R17.1@-2479.54,1554.84 ; -2496.61,1561.91 cw(c-2513.68,1544.84) R17.1@-2489.54,1544.84 ; -2496.61,1561.91 ccw(c-2479.54,1578.98) R17.1@-2479.54,1554.84 ; -2496.61,1561.91 cw(c-2513.68,1544.84) R17.1@-2489.54,1544.84 ; -2496.61,1561.91 ccw(c-2479.54,1578.98) R17.1@-2479.54,1554.84 ; -2496.61,1561.91 ccw(c-2479.54,1578.98) R17.1@-2479.54,1554.84 ; -2496.61,1561.91 cw(c-2513.68,1544.84) R17.1@-2489.54,1544.84 ; -2496.61,1561.91 ccw(c-2479.54,1578.98) R17.1@-2479.54,1554.84 ; -2496.61,1561.91 cw(c-2513.68,1544.84) R17.1@-2489.54,1544.84 ; -2496.61,1561.91 ccw(c-2479.54,1578.98) R17.1@-2479.54,1554.84 ; -2496.61,1561.91 cw(c-2513.68,1544.84) R17.1@-2489.54,1544.84 ; -2496.61,1561.91 ccw(c-2479.54,1578.98) R17.1@-2479.54,1554.84 ; -2496.61,1561.91 cw(c-2513.68,1544.84) R17.1@-2489.54,1544.84
NetU4_17: RP2.1 U4.17 | length 1608.2
  TopLayer w10: U4.17@-2669.54,1885.84 -2538.54,1885.84 RP2.1@-2519.54,1904.84 ; -2613.69,1885.84 ccw(c-2613.69,1999) RP2.1@-2533.68,1918.98 ; -2613.69,1885.84 ccw(c-2613.69,1999) RP2.1@-2533.68,1918.98 ; -2613.69,1885.84 ccw(c-2613.69,1999) RP2.1@-2533.68,1918.98 ; -2613.69,1885.84 ccw(c-2613.69,1999) RP2.1@-2533.68,1918.98 ; -2613.69,1885.84 ccw(c-2613.69,1999) RP2.1@-2533.68,1918.98 ; -2613.69,1885.84 ccw(c-2613.69,1999) RP2.1@-2533.68,1918.98 ; -2589.55,1885.84 ccw(c-2589.55,1974.85) RP2.1@-2526.61,1911.91 ; -2589.55,1885.84 ccw(c-2589.55,1974.85) RP2.1@-2526.61,1911.91 ; -2589.55,1885.84 ccw(c-2589.55,1974.85) RP2.1@-2526.61,1911.91 ; -2589.55,1885.84 ccw(c-2589.55,1974.85) RP2.1@-2526.61,1911.91 ; -2589.55,1885.84 ccw(c-2589.55,1974.85) RP2.1@-2526.61,1911.91 ; -2589.55,1885.84 ccw(c-2589.55,1974.85) RP2.1@-2526.61,1911.91 ; -2565.41,1885.84 ccw(c-2565.41,1950.71) RP2.1@-2519.54,1904.84 ; -2565.41,1885.84 ccw(c-2565.41,1950.71) RP2.1@-2519.54,1904.84 ; -2565.41,1885.84 ccw(c-2565.41,1950.71) RP2.1@-2519.54,1904.84 ; -2565.41,1885.84 ccw(c-2565.41,1950.71) RP2.1@-2519.54,1904.84 ; -2565.41,1885.84 ccw(c-2565.41,1950.71) RP2.1@-2519.54,1904.84 ; -2565.41,1885.84 ccw(c-2565.41,1950.71) RP2.1@-2519.54,1904.84 ; RP2.1@-2541.26,1885.84 ccw(c-2541.26,1926.57) RP2.1@-2512.46,1897.77 ; RP2.1@-2541.26,1885.84 ccw(c-2541.26,1926.57) RP2.1@-2512.46,1897.77 ; RP2.1@-2541.26,1885.84 ccw(c-2541.26,1926.57) RP2.1@-2512.46,1897.77 ; RP2.1@-2541.26,1885.84 ccw(c-2541.26,1926.57) RP2.1@-2512.46,1897.77 ; RP2.1@-2541.26,1885.84 ccw(c-2541.26,1926.57) RP2.1@-2512.46,1897.77 ; RP2.1@-2541.26,1885.84 ccw(c-2541.26,1926.57) RP2.1@-2512.46,1897.77
NetU4_23: S4.1 U4.23 | length 242.4
  TopLayer w10: U4.23@-2725.54,1999.84 -2725.54,2029.84 cw(c-2706.3,2032.34) -2725.54,2034.84 -2725.54,2045.84 -2684.88,2086.49 ; -2725.54,2039.84 -2691.54,2073.84 ; -2699.05,2072.33 ccw(c-2699.05,2086.49) -2684.88,2086.49 ; -2690.53,2080.85 -2690.53,2090.85 ccw(c-2685.53,2072.86) -2703.51,2067.86 cw(c-2684.88,2067.86) -2684.88,2086.49
NetU4_26: U4.26 Y-MOT.2 | length 1042.4
  TopLayer w10: U4.26@-2784.54,1999.84 -2784.54,2071.84
  TopLayer w23.62: Y-MOT.2@-2819.54,2604.84 -2784.54,2569.84 ; -2784.54,2071.84 -2784.54,2101.84 ; -2784.54,2106.84 -2784.54,2569.84 ; Y-MOT.2@-2817.06,2581.35 cw(c-2812.85,2541.53) -2784.54,2569.84 ; Y-MOT.2@-2817.06,2581.35 cw(c-2812.85,2541.53) -2784.54,2569.84 ; Y-MOT.2@-2817.06,2581.35 cw(c-2812.85,2541.53) -2784.54,2569.84 ; Y-MOT.2@-2817.06,2581.35 cw(c-2812.85,2541.53) -2784.54,2569.84 ; Y-MOT.2@-2817.06,2581.35 cw(c-2812.85,2541.53) -2784.54,2569.84 ; Y-MOT.2@-2817.06,2581.35 cw(c-2812.85,2541.53) -2784.54,2569.84 ; Y-MOT.2@-2796.04,2602.36 ccw(c-2756.22,2598.16) -2784.54,2569.84 ; Y-MOT.2@-2796.04,2602.36 ccw(c-2756.22,2598.16) -2784.54,2569.84 ; Y-MOT.2@-2796.04,2602.36 ccw(c-2756.22,2598.16) -2784.54,2569.84 ; Y-MOT.2@-2796.04,2602.36 ccw(c-2756.22,2598.16) -2784.54,2569.84 ; Y-MOT.2@-2796.04,2602.36 ccw(c-2756.22,2598.16) -2784.54,2569.84 ; Y-MOT.2@-2796.04,2602.36 ccw(c-2756.22,2598.16) -2784.54,2569.84
NetU4_27: S3.1 U4.27 | length 6306.5
  TopLayer w10: S3.1@-2891.54,2275.84 -2869.54,2275.84 -2835.54,2241.84 -2835.54,2068.84 ; S3.1@-2863.18,2248.83 cw(c-2855.56,2220.82) -2835.04,2241.34 cw(c-2813.45,2262.93) S3.1@-2843.23,2269.66 ; -2835.54,2073.84 cw(c-2838.04,2049.14) -2813.33,2046.64 ; -2824.42,2057.73 cw(c-2824.42,2068.84) -2835.54,2068.84 ; -2823.5,2063.81 cw(c-2827,2046.31) -2809.5,2042.81 ; U4.27@-2804.54,1999.84 -2804.54,2037.84 -2835.54,2068.84 ; S3.1@-2890.33,2256.04 cw(c-3022.63,2123.75) -2835.54,2123.75 ; S3.1@-2890.33,2256.04 cw(c-3022.63,2123.75) -2835.54,2123.75 ; S3.1@-2890.33,2256.04 cw(c-3022.63,2123.75) -2835.54,2123.75 ; S3.1@-2890.33,2256.04 cw(c-3022.63,2123.75) -2835.54,2123.75 ; S3.1@-2890.33,2256.04 cw(c-3022.63,2123.75) -2835.54,2123.75 ; S3.1@-2890.33,2256.04 cw(c-3022.63,2123.75) -2835.54,2123.75 ; S3.1@-2890.33,2256.04 cw(c-3022.63,2123.75) -2835.54,2123.75 ; S3.1@-2890.33,2256.04 cw(c-3022.63,2123.75) -2835.54,2123.75 ; S3.1@-2890.33,2256.04 cw(c-3022.63,2123.75) -2835.54,2123.75 ; S3.1@-2883.26,2263.11 cw(c-2998.49,2147.89) -2835.54,2147.89 ; S3.1@-2883.26,2263.11 cw(c-2998.49,2147.89) -2835.54,2147.89 ; S3.1@-2883.26,2263.11 cw(c-2998.49,2147.89) -2835.54,2147.89 ; S3.1@-2883.26,2263.11 cw(c-2998.49,2147.89) -2835.54,2147.89 ; S3.1@-2883.26,2263.11 cw(c-2998.49,2147.89) -2835.54,2147.89 ; S3.1@-2883.26,2263.11 cw(c-2998.49,2147.89) -2835.54,2147.89 ; S3.1@-2883.26,2263.11 cw(c-2998.49,2147.89) -2835.54,2147.89 ; S3.1@-2883.26,2263.11 cw(c-2998.49,2147.89) -2835.54,2147.89 ; S3.1@-2883.26,2263.11 cw(c-2998.49,2147.89) -2835.54,2147.89 ; S3.1@-2876.19,2270.19 cw(c-2974.35,2172.03) -2835.54,2172.03 ; S3.1@-2876.19,2270.19 cw(c-2974.35,2172.03) -2835.54,2172.03 ; S3.1@-2876.19,2270.19 cw(c-2974.35,2172.03) -2835.54,2172.03 ; S3.1@-2876.19,2270.19 cw(c-2974.35,2172.03) -2835.54,2172.03 ; S3.1@-2876.19,2270.19 cw(c-2974.35,2172.03) -2835.54,2172.03 ; S3.1@-2876.19,2270.19 cw(c-2974.35,2172.03) -2835.54,2172.03 ; S3.1@-2876.19,2270.19 cw(c-2974.35,2172.03) -2835.54,2172.03 ; S3.1@-2876.19,2270.19 cw(c-2974.35,2172.03) -2835.54,2172.03 ; S3.1@-2876.19,2270.19 cw(c-2974.35,2172.03) -2835.54,2172.03 ; S3.1@-2869.12,2277.26 cw(c-2950.2,2196.17) -2835.54,2196.17 ; S3.1@-2869.12,2277.26 cw(c-2950.2,2196.17) -2835.54,2196.17 ; S3.1@-2869.12,2277.26 cw(c-2950.2,2196.17) -2835.54,2196.17 ; S3.1@-2869.12,2277.26 cw(c-2950.2,2196.17) -2835.54,2196.17 ; S3.1@-2869.12,2277.26 cw(c-2950.2,2196.17) -2835.54,2196.17 ; S3.1@-2869.12,2277.26 cw(c-2950.2,2196.17) -2835.54,2196.17 ; S3.1@-2869.12,2277.26 cw(c-2950.2,2196.17) -2835.54,2196.17 ; S3.1@-2869.12,2277.26 cw(c-2950.2,2196.17) -2835.54,2196.17 ; S3.1@-2869.12,2277.26 cw(c-2950.2,2196.17) -2835.54,2196.17 ; S3.1@-2862.5,2249.02 cw(c-2854.86,2223.52) -2836.04,2242.34 ; S3.1@-2862.5,2249.02 cw(c-2854.86,2223.52) -2836.04,2242.34 ; S3.1@-2862.5,2249.02 cw(c-2854.86,2223.52) -2836.04,2242.34 ; S3.1@-2862.5,2249.02 cw(c-2854.86,2223.52) -2836.04,2242.34 ; S3.1@-2862.5,2249.02 cw(c-2854.86,2223.52) -2836.04,2242.34 ; S3.1@-2862.5,2249.02 cw(c-2854.86,2223.52) -2836.04,2242.34 ; S3.1@-2862.5,2249.02 cw(c-2854.86,2223.52) -2836.04,2242.34 ; S3.1@-2862.5,2249.02 cw(c-2854.86,2223.52) -2836.04,2242.34 ; S3.1@-2862.05,2284.33 cw(c-2926.06,2220.32) -2835.54,2220.32 ; S3.1@-2862.05,2284.33 cw(c-2926.06,2220.32) -2835.54,2220.32 ; S3.1@-2862.05,2284.33 cw(c-2926.06,2220.32) -2835.54,2220.32 ; S3.1@-2862.05,2284.33 cw(c-2926.06,2220.32) -2835.54,2220.32 ; S3.1@-2862.05,2284.33 cw(c-2926.06,2220.32) -2835.54,2220.32 ; S3.1@-2862.05,2284.33 cw(c-2926.06,2220.32) -2835.54,2220.32 ; S3.1@-2862.05,2284.33 cw(c-2926.06,2220.32) -2835.54,2220.32 ; S3.1@-2862.05,2284.33 cw(c-2926.06,2220.32) -2835.54,2220.32 ; S3.1@-2862.05,2284.33 cw(c-2926.06,2220.32) -2835.54,2220.32 ; S3.1@-2854.98,2291.4 cw(c-2901.92,2244.46) -2835.54,2244.46 ; S3.1@-2854.98,2291.4 cw(c-2901.92,2244.46) -2835.54,2244.46 ; S3.1@-2854.98,2291.4 cw(c-2901.92,2244.46) -2835.54,2244.46 ; S3.1@-2854.98,2291.4 cw(c-2901.92,2244.46) -2835.54,2244.46 ; S3.1@-2854.98,2291.4 cw(c-2901.92,2244.46) -2835.54,2244.46 ; S3.1@-2854.98,2291.4 cw(c-2901.92,2244.46) -2835.54,2244.46 ; S3.1@-2854.98,2291.4 cw(c-2901.92,2244.46) -2835.54,2244.46 ; S3.1@-2854.98,2291.4 cw(c-2901.92,2244.46) -2835.54,2244.46 ; S3.1@-2854.98,2291.4 cw(c-2901.92,2244.46) -2835.54,2244.46 ; S3.1@-2843.39,2268.99 ccw(c-2816.24,2262.14) -2836.04,2242.34 ; S3.1@-2843.39,2268.99 ccw(c-2816.24,2262.14) -2836.04,2242.34 ; S3.1@-2843.39,2268.99 ccw(c-2816.24,2262.14) -2836.04,2242.34 ; S3.1@-2843.39,2268.99 ccw(c-2816.24,2262.14) -2836.04,2242.34 ; S3.1@-2843.39,2268.99 ccw(c-2816.24,2262.14) -2836.04,2242.34 ; S3.1@-2843.39,2268.99 ccw(c-2816.24,2262.14) -2836.04,2242.34 ; S3.1@-2843.39,2268.99 ccw(c-2816.24,2262.14) -2836.04,2242.34 ; S3.1@-2843.39,2268.99 ccw(c-2816.24,2262.14) -2836.04,2242.34
NetU5_3: 
NetU6_1: U6.1 Z-MOT.1 | length 1438.1
  TopLayer w10: U6.1@-2071.54,1967.88 ccw(c-2081.52,1964.86) -2084.54,1974.84 ccw(c-2078.55,1973.86) -2079.54,1967.88 U6.1@-2042.54,1967.88
  TopLayer w20: -2126.54,2016.84 -2084.54,1974.84
  TopLayer w25: -2214.54,2484.84 -2214.54,2574.84 -2184.54,2604.84 Z-MOT.1@-2114.54,2604.84 ; -2214.54,2571.93 -2214.54,2140.8 -2126.54,2052.8 -2126.54,2016.84 ; -2169.9,2604.84 cw(c-2169.9,2549.48) Z-MOT.1@-2130.75,2588.63 ; -2169.9,2604.84 ccw(c-2169.9,2660.21) Z-MOT.1@-2130.75,2621.06 ; -2169.9,2604.84 cw(c-2169.9,2549.48) Z-MOT.1@-2130.75,2588.63 ; -2169.9,2604.84 ccw(c-2169.9,2660.21) Z-MOT.1@-2130.75,2621.06 ; -2169.9,2604.84 cw(c-2169.9,2549.48) Z-MOT.1@-2130.75,2588.63 ; -2169.9,2604.84 ccw(c-2169.9,2660.21) Z-MOT.1@-2130.75,2621.06 ; -2169.9,2604.84 ccw(c-2169.9,2660.21) Z-MOT.1@-2130.75,2621.06 ; -2169.9,2604.84 cw(c-2169.9,2549.48) Z-MOT.1@-2130.75,2588.63 ; -2169.9,2604.84 ccw(c-2169.9,2660.21) Z-MOT.1@-2130.75,2621.06 ; -2169.9,2604.84 cw(c-2169.9,2549.48) Z-MOT.1@-2130.75,2588.63 ; -2169.9,2604.84 ccw(c-2169.9,2660.21) Z-MOT.1@-2130.75,2621.06 ; -2169.9,2604.84 cw(c-2169.9,2549.48) Z-MOT.1@-2130.75,2588.63
NetU6_8: C38.1 U6.8 | length 576.4
  TopLayer w10: C38.1@-2189.54,1664.84 -2040.5,1813.88 U6.8@-2016.12,1813.88 ; C38.1@-2189.54,1674.84 ccw(c-2189.54,1698.98) -2172.46,1681.91 ; C38.1@-2189.54,1674.84 ccw(c-2189.54,1698.98) -2172.46,1681.91 ; C38.1@-2189.54,1674.84 ccw(c-2189.54,1698.98) -2172.46,1681.91 ; C38.1@-2189.54,1674.84 ccw(c-2189.54,1698.98) -2172.46,1681.91 ; C38.1@-2189.54,1674.84 ccw(c-2189.54,1698.98) -2172.46,1681.91 ; C38.1@-2189.54,1674.84 ccw(c-2189.54,1698.98) -2172.46,1681.91 ; C38.1@-2189.54,1674.84 ccw(c-2189.54,1698.98) -2172.46,1681.91 ; C38.1@-2189.54,1674.84 ccw(c-2189.54,1698.98) -2172.46,1681.91 ; C38.1@-2189.54,1674.84 ccw(c-2189.54,1698.98) -2172.46,1681.91 ; C38.1@-2179.54,1664.84 cw(c-2155.39,1664.84) -2172.46,1681.91 ; C38.1@-2179.54,1664.84 cw(c-2155.39,1664.84) -2172.46,1681.91 ; C38.1@-2179.54,1664.84 cw(c-2155.39,1664.84) -2172.46,1681.91 ; C38.1@-2179.54,1664.84 cw(c-2155.39,1664.84) -2172.46,1681.91 ; C38.1@-2179.54,1664.84 cw(c-2155.39,1664.84) -2172.46,1681.91 ; C38.1@-2179.54,1664.84 cw(c-2155.39,1664.84) -2172.46,1681.91 ; C38.1@-2179.54,1664.84 cw(c-2155.39,1664.84) -2172.46,1681.91 ; C38.1@-2179.54,1664.84 cw(c-2155.39,1664.84) -2172.46,1681.91 ; C38.1@-2179.54,1664.84 cw(c-2155.39,1664.84) -2172.46,1681.91
NetU6_12: R21.1 U6.12 U6.14 | length 2237.5
  TopLayer w10: U6.12@-1936.62,1813.88 -1936.62,1743.93 -1833.54,1640.84 ; U6.14@-1896.12,1813.88 U6.14@-1896.62,1813.88 -1885.67,1813.88 v2(-1811.54,1739.75) ; v2@-1804,1647.35 ccw(c-1792.54,1654.2) -1792.54,1640.84 ; R21.1@-1780.62,1602.88 -1780.62,1628.93 -1792.54,1640.84 ; -1833.53,1640.84 ccw(c-1833.53,1659.9) v2@-1818.47,1648.22 ; -1833.53,1640.84 ccw(c-1833.53,1659.9) v2@-1818.47,1648.22 ; -1833.53,1640.84 ccw(c-1833.53,1659.9) v2@-1818.47,1648.22 ; -1833.53,1640.84 ccw(c-1833.53,1659.9) v2@-1818.47,1648.22 ; -1833.53,1640.84 ccw(c-1833.53,1659.9) v2@-1818.47,1648.22 ; -1833.53,1640.84 ccw(c-1833.53,1659.9) v2@-1818.47,1648.22 ; -1833.53,1640.84 ccw(c-1833.53,1659.9) v2@-1818.47,1648.22 ; -1833.53,1640.84 ccw(c-1833.53,1659.9) v2@-1818.47,1648.22 ; -1833.53,1640.84 ccw(c-1833.53,1659.9) v2@-1818.47,1648.22 ; -1833.54,1640.84 -1792.54,1640.84 ; -1827.9,1640.84 cw(c-1827.9,1626.48) v2@-1817.74,1636.63 ; -1827.9,1640.84 cw(c-1827.9,1626.48) v2@-1817.74,1636.63 ; -1827.9,1640.84 cw(c-1827.9,1626.48) v2@-1817.74,1636.63 ; -1827.9,1640.84 cw(c-1827.9,1626.48) v2@-1817.74,1636.63 ; -1827.9,1640.84 cw(c-1827.9,1626.48) v2@-1817.74,1636.63 ; -1827.9,1640.84 cw(c-1827.9,1626.48) v2@-1817.74,1636.63 ; -1827.9,1640.84 cw(c-1827.9,1626.48) v2@-1817.74,1636.63 ; -1827.9,1640.84 cw(c-1827.9,1626.48) v2@-1817.74,1636.63 ; -1827.9,1640.84 cw(c-1827.9,1626.48) v2@-1817.74,1636.63 ; -1826.52,1754.73 cw(c-1841.51,1739.75) v2@-1820.31,1739.75 ; -1826.52,1754.73 ccw(c-1811.54,1769.72) v2@-1811.54,1748.52 ; -1826.52,1754.73 cw(c-1841.51,1739.75) v2@-1820.31,1739.75 ; -1826.52,1754.73 ccw(c-1811.54,1769.72) v2@-1811.54,1748.52 ; -1826.52,1754.73 cw(c-1841.51,1739.75) v2@-1820.31,1739.75 ; -1826.52,1754.73 ccw(c-1811.54,1769.72) v2@-1811.54,1748.52 ; -1826.52,1754.73 cw(c-1841.51,1739.75) v2@-1820.31,1739.75 ; -1826.52,1754.73 ccw(c-1811.54,1769.72) v2@-1811.54,1748.52 ; -1826.52,1754.73 cw(c-1841.51,1739.75) v2@-1820.31,1739.75 ; -1826.52,1754.73 ccw(c-1811.54,1769.72) v2@-1811.54,1748.52 ; -1826.52,1754.73 ccw(c-1811.54,1769.72) v2@-1811.54,1748.52 ; -1826.52,1754.73 cw(c-1841.51,1739.75) v2@-1820.31,1739.75 ; -1826.52,1754.73 ccw(c-1811.54,1769.72) v2@-1811.54,1748.52 ; -1826.52,1754.73 cw(c-1841.51,1739.75) v2@-1820.31,1739.75 ; -1826.52,1754.73 ccw(c-1811.54,1769.72) v2@-1811.54,1748.52 ; -1826.52,1754.73 cw(c-1841.51,1739.75) v2@-1820.31,1739.75 ; -1826.52,1754.73 ccw(c-1811.54,1769.72) v2@-1811.54,1748.52 ; -1826.52,1754.73 cw(c-1841.51,1739.75) v2@-1820.31,1739.75 ; v2@-1805.33,1636.63 cw(c-1795.17,1626.48) -1795.17,1640.84 ; v2@-1805.33,1636.63 cw(c-1795.17,1626.48) -1795.17,1640.84 ; v2@-1805.33,1636.63 cw(c-1795.17,1626.48) -1795.17,1640.84 ; v2@-1805.33,1636.63 cw(c-1795.17,1626.48) -1795.17,1640.84 ; v2@-1805.33,1636.63 cw(c-1795.17,1626.48) -1795.17,1640.84 ; v2@-1805.33,1636.63 cw(c-1795.17,1626.48) -1795.17,1640.84 ; v2@-1805.33,1636.63 cw(c-1795.17,1626.48) -1795.17,1640.84 ; v2@-1805.33,1636.63 cw(c-1795.17,1626.48) -1795.17,1640.84 ; v2@-1805.33,1636.63 cw(c-1795.17,1626.48) -1795.17,1640.84 ; v2@-1804.02,1647.38 ccw(c-1792.43,1654.38) -1792.43,1640.84 ; v2@-1804.02,1647.38 ccw(c-1792.43,1654.38) -1792.43,1640.84 ; v2@-1804.02,1647.38 ccw(c-1792.43,1654.38) -1792.43,1640.84 ; v2@-1804.02,1647.38 ccw(c-1792.43,1654.38) -1792.43,1640.84 ; v2@-1804.02,1647.38 ccw(c-1792.43,1654.38) -1792.43,1640.84 ; v2@-1804.02,1647.38 ccw(c-1792.43,1654.38) -1792.43,1640.84 ; v2@-1804.02,1647.38 ccw(c-1792.43,1654.38) -1792.43,1640.84 ; v2@-1804.02,1647.38 ccw(c-1792.43,1654.38) -1792.43,1640.84 ; R21.1@-1787.69,1609.95 ccw(c-1804.76,1627.02) -1780.62,1627.02 ; R21.1@-1787.69,1609.95 ccw(c-1804.76,1627.02) -1780.62,1627.02 ; R21.1@-1787.69,1609.95 ccw(c-1804.76,1627.02) -1780.62,1627.02 ; R21.1@-1787.69,1609.95 ccw(c-1804.76,1627.02) -1780.62,1627.02 ; R21.1@-1787.69,1609.95 ccw(c-1804.76,1627.02) -1780.62,1627.02 ; R21.1@-1787.69,1609.95 ccw(c-1804.76,1627.02) -1780.62,1627.02 ; R21.1@-1787.69,1609.95 ccw(c-1804.76,1627.02) -1780.62,1627.02 ; R21.1@-1787.69,1609.95 ccw(c-1804.76,1627.02) -1780.62,1627.02 ; R21.1@-1787.69,1609.95 ccw(c-1804.76,1627.02) -1780.62,1627.02 ; -1780.62,1627.02 ccw(c-1756.48,1627.02) R21.1@-1773.55,1609.95 ; -1780.62,1627.02 ccw(c-1756.48,1627.02) R21.1@-1773.55,1609.95 ; -1780.62,1627.02 ccw(c-1756.48,1627.02) R21.1@-1773.55,1609.95 ; -1780.62,1627.02 ccw(c-1756.48,1627.02) R21.1@-1773.55,1609.95 ; -1780.62,1627.02 ccw(c-1756.48,1627.02) R21.1@-1773.55,1609.95 ; -1780.62,1627.02 ccw(c-1756.48,1627.02) R21.1@-1773.55,1609.95 ; -1780.62,1627.02 ccw(c-1756.48,1627.02) R21.1@-1773.55,1609.95 ; -1780.62,1627.02 ccw(c-1756.48,1627.02) R21.1@-1773.55,1609.95 ; -1780.62,1627.02 ccw(c-1756.48,1627.02) R21.1@-1773.55,1609.95
  BottomLayer w10: v2(-1811.54,1642.84) v2(-1811.54,1739.75) ; v2@-1817.74,1649.05 ccw(c-1832.73,1664.04) -1811.54,1664.04 ; v2@-1817.74,1649.05 ccw(c-1832.73,1664.04) -1811.54,1664.04 ; v2@-1817.74,1649.05 ccw(c-1832.73,1664.04) -1811.54,1664.04 ; v2@-1817.74,1649.05 ccw(c-1832.73,1664.04) -1811.54,1664.04 ; v2@-1817.74,1649.05 ccw(c-1832.73,1664.04) -1811.54,1664.04 ; v2@-1817.74,1649.05 ccw(c-1832.73,1664.04) -1811.54,1664.04 ; v2@-1817.74,1649.05 ccw(c-1832.73,1664.04) -1811.54,1664.04 ; v2@-1817.74,1649.05 ccw(c-1832.73,1664.04) -1811.54,1664.04 ; v2@-1817.74,1649.05 ccw(c-1832.73,1664.04) -1811.54,1664.04 ; v2@-1817.74,1733.54 cw(c-1832.73,1718.55) -1811.54,1718.55 ; v2@-1817.74,1733.54 cw(c-1832.73,1718.55) -1811.54,1718.55 ; v2@-1817.74,1733.54 cw(c-1832.73,1718.55) -1811.54,1718.55 ; v2@-1817.74,1733.54 cw(c-1832.73,1718.55) -1811.54,1718.55 ; v2@-1817.74,1733.54 cw(c-1832.73,1718.55) -1811.54,1718.55 ; v2@-1817.74,1733.54 cw(c-1832.73,1718.55) -1811.54,1718.55 ; v2@-1817.74,1733.54 cw(c-1832.73,1718.55) -1811.54,1718.55 ; v2@-1817.74,1733.54 cw(c-1832.73,1718.55) -1811.54,1718.55 ; v2@-1817.74,1733.54 cw(c-1832.73,1718.55) -1811.54,1718.55 ; -1811.54,1664.04 ccw(c-1790.34,1664.04) v2@-1805.33,1649.05 ; -1811.54,1664.04 ccw(c-1790.34,1664.04) v2@-1805.33,1649.05 ; -1811.54,1664.04 ccw(c-1790.34,1664.04) v2@-1805.33,1649.05 ; -1811.54,1664.04 ccw(c-1790.34,1664.04) v2@-1805.33,1649.05 ; -1811.54,1664.04 ccw(c-1790.34,1664.04) v2@-1805.33,1649.05 ; -1811.54,1664.04 ccw(c-1790.34,1664.04) v2@-1805.33,1649.05 ; -1811.54,1664.04 ccw(c-1790.34,1664.04) v2@-1805.33,1649.05 ; -1811.54,1664.04 ccw(c-1790.34,1664.04) v2@-1805.33,1649.05 ; -1811.54,1664.04 ccw(c-1790.34,1664.04) v2@-1805.33,1649.05 ; -1811.54,1718.55 cw(c-1790.34,1718.55) v2@-1805.33,1733.54 ; -1811.54,1718.55 cw(c-1790.34,1718.55) v2@-1805.33,1733.54 ; -1811.54,1718.55 cw(c-1790.34,1718.55) v2@-1805.33,1733.54 ; -1811.54,1718.55 cw(c-1790.34,1718.55) v2@-1805.33,1733.54 ; -1811.54,1718.55 cw(c-1790.34,1718.55) v2@-1805.33,1733.54 ; -1811.54,1718.55 cw(c-1790.34,1718.55) v2@-1805.33,1733.54 ; -1811.54,1718.55 cw(c-1790.34,1718.55) v2@-1805.33,1733.54 ; -1811.54,1718.55 cw(c-1790.34,1718.55) v2@-1805.33,1733.54 ; -1811.54,1718.55 cw(c-1790.34,1718.55) v2@-1805.33,1733.54
NetU6_13: R20.1 U6.13 | length 743.8
  TopLayer w10: U6.13@-1916.62,1813.88 -1916.62,1767.93 -1838.15,1689.45 -1838.15,1688.45 -1779.15,1688.45 -1718.54,1627.84 -1718.54,1595.79 R20.1@-1670.62,1547.88 ; -1687.69,1564.95 cw(c-1704.76,1547.88) R20.1@-1680.62,1547.88 ; -1687.69,1564.95 ccw(c-1670.62,1582.02) R20.1@-1670.62,1557.88 ; -1687.69,1564.95 cw(c-1704.76,1547.88) R20.1@-1680.62,1547.88 ; -1687.69,1564.95 ccw(c-1670.62,1582.02) R20.1@-1670.62,1557.88 ; -1687.69,1564.95 cw(c-1704.76,1547.88) R20.1@-1680.62,1547.88 ; -1687.69,1564.95 ccw(c-1670.62,1582.02) R20.1@-1670.62,1557.88 ; -1687.69,1564.95 cw(c-1704.76,1547.88) R20.1@-1680.62,1547.88 ; -1687.69,1564.95 ccw(c-1670.62,1582.02) R20.1@-1670.62,1557.88 ; -1687.69,1564.95 cw(c-1704.76,1547.88) R20.1@-1680.62,1547.88 ; -1687.69,1564.95 ccw(c-1670.62,1582.02) R20.1@-1670.62,1557.88 ; -1687.69,1564.95 ccw(c-1670.62,1582.02) R20.1@-1670.62,1557.88 ; -1687.69,1564.95 cw(c-1704.76,1547.88) R20.1@-1680.62,1547.88 ; -1687.69,1564.95 ccw(c-1670.62,1582.02) R20.1@-1670.62,1557.88 ; -1687.69,1564.95 cw(c-1704.76,1547.88) R20.1@-1680.62,1547.88 ; -1687.69,1564.95 ccw(c-1670.62,1582.02) R20.1@-1670.62,1557.88 ; -1687.69,1564.95 cw(c-1704.76,1547.88) R20.1@-1680.62,1547.88 ; -1687.69,1564.95 ccw(c-1670.62,1582.02) R20.1@-1670.62,1557.88 ; -1687.69,1564.95 cw(c-1704.76,1547.88) R20.1@-1680.62,1547.88
NetU6_17: RP3.1 U6.17 | length 1608.2
  TopLayer w10: U6.17@-1860.62,1888.88 -1729.62,1888.88 RP3.1@-1710.62,1907.88 ; -1804.78,1888.88 ccw(c-1804.78,2002.04) RP3.1@-1724.76,1922.02 ; -1804.78,1888.88 ccw(c-1804.78,2002.04) RP3.1@-1724.76,1922.02 ; -1804.78,1888.88 ccw(c-1804.78,2002.04) RP3.1@-1724.76,1922.02 ; -1804.78,1888.88 ccw(c-1804.78,2002.04) RP3.1@-1724.76,1922.02 ; -1804.78,1888.88 ccw(c-1804.78,2002.04) RP3.1@-1724.76,1922.02 ; -1804.78,1888.88 ccw(c-1804.78,2002.04) RP3.1@-1724.76,1922.02 ; -1780.64,1888.88 ccw(c-1780.64,1977.89) RP3.1@-1717.69,1914.95 ; -1780.64,1888.88 ccw(c-1780.64,1977.89) RP3.1@-1717.69,1914.95 ; -1780.64,1888.88 ccw(c-1780.64,1977.89) RP3.1@-1717.69,1914.95 ; -1780.64,1888.88 ccw(c-1780.64,1977.89) RP3.1@-1717.69,1914.95 ; -1780.64,1888.88 ccw(c-1780.64,1977.89) RP3.1@-1717.69,1914.95 ; -1780.64,1888.88 ccw(c-1780.64,1977.89) RP3.1@-1717.69,1914.95 ; -1756.49,1888.88 ccw(c-1756.49,1953.75) RP3.1@-1710.62,1907.88 ; -1756.49,1888.88 ccw(c-1756.49,1953.75) RP3.1@-1710.62,1907.88 ; -1756.49,1888.88 ccw(c-1756.49,1953.75) RP3.1@-1710.62,1907.88 ; -1756.49,1888.88 ccw(c-1756.49,1953.75) RP3.1@-1710.62,1907.88 ; -1756.49,1888.88 ccw(c-1756.49,1953.75) RP3.1@-1710.62,1907.88 ; -1756.49,1888.88 ccw(c-1756.49,1953.75) RP3.1@-1710.62,1907.88 ; RP3.1@-1732.35,1888.88 ccw(c-1732.35,1929.61) RP3.1@-1703.55,1900.81 ; RP3.1@-1732.35,1888.88 ccw(c-1732.35,1929.61) RP3.1@-1703.55,1900.81 ; RP3.1@-1732.35,1888.88 ccw(c-1732.35,1929.61) RP3.1@-1703.55,1900.81 ; RP3.1@-1732.35,1888.88 ccw(c-1732.35,1929.61) RP3.1@-1703.55,1900.81 ; RP3.1@-1732.35,1888.88 ccw(c-1732.35,1929.61) RP3.1@-1703.55,1900.81 ; RP3.1@-1732.35,1888.88 ccw(c-1732.35,1929.61) RP3.1@-1703.55,1900.81